# Altium PCB Test.PcbDoc (part 3 of 4)
Units mm, origin at the board's own origin, x right, y up, seen from the top; angles counter-clockwise.
Board outline 152.4 x 101.6 mm, 4 copper layers (Top Layer 1, Top Layer, Bottom Layer, Bottom Layer 1), stack 0.603 mm thick; 308 components, 154 nets, 859 pads, 6474 vias.
Unrouted connection lines stored in the file: 683.
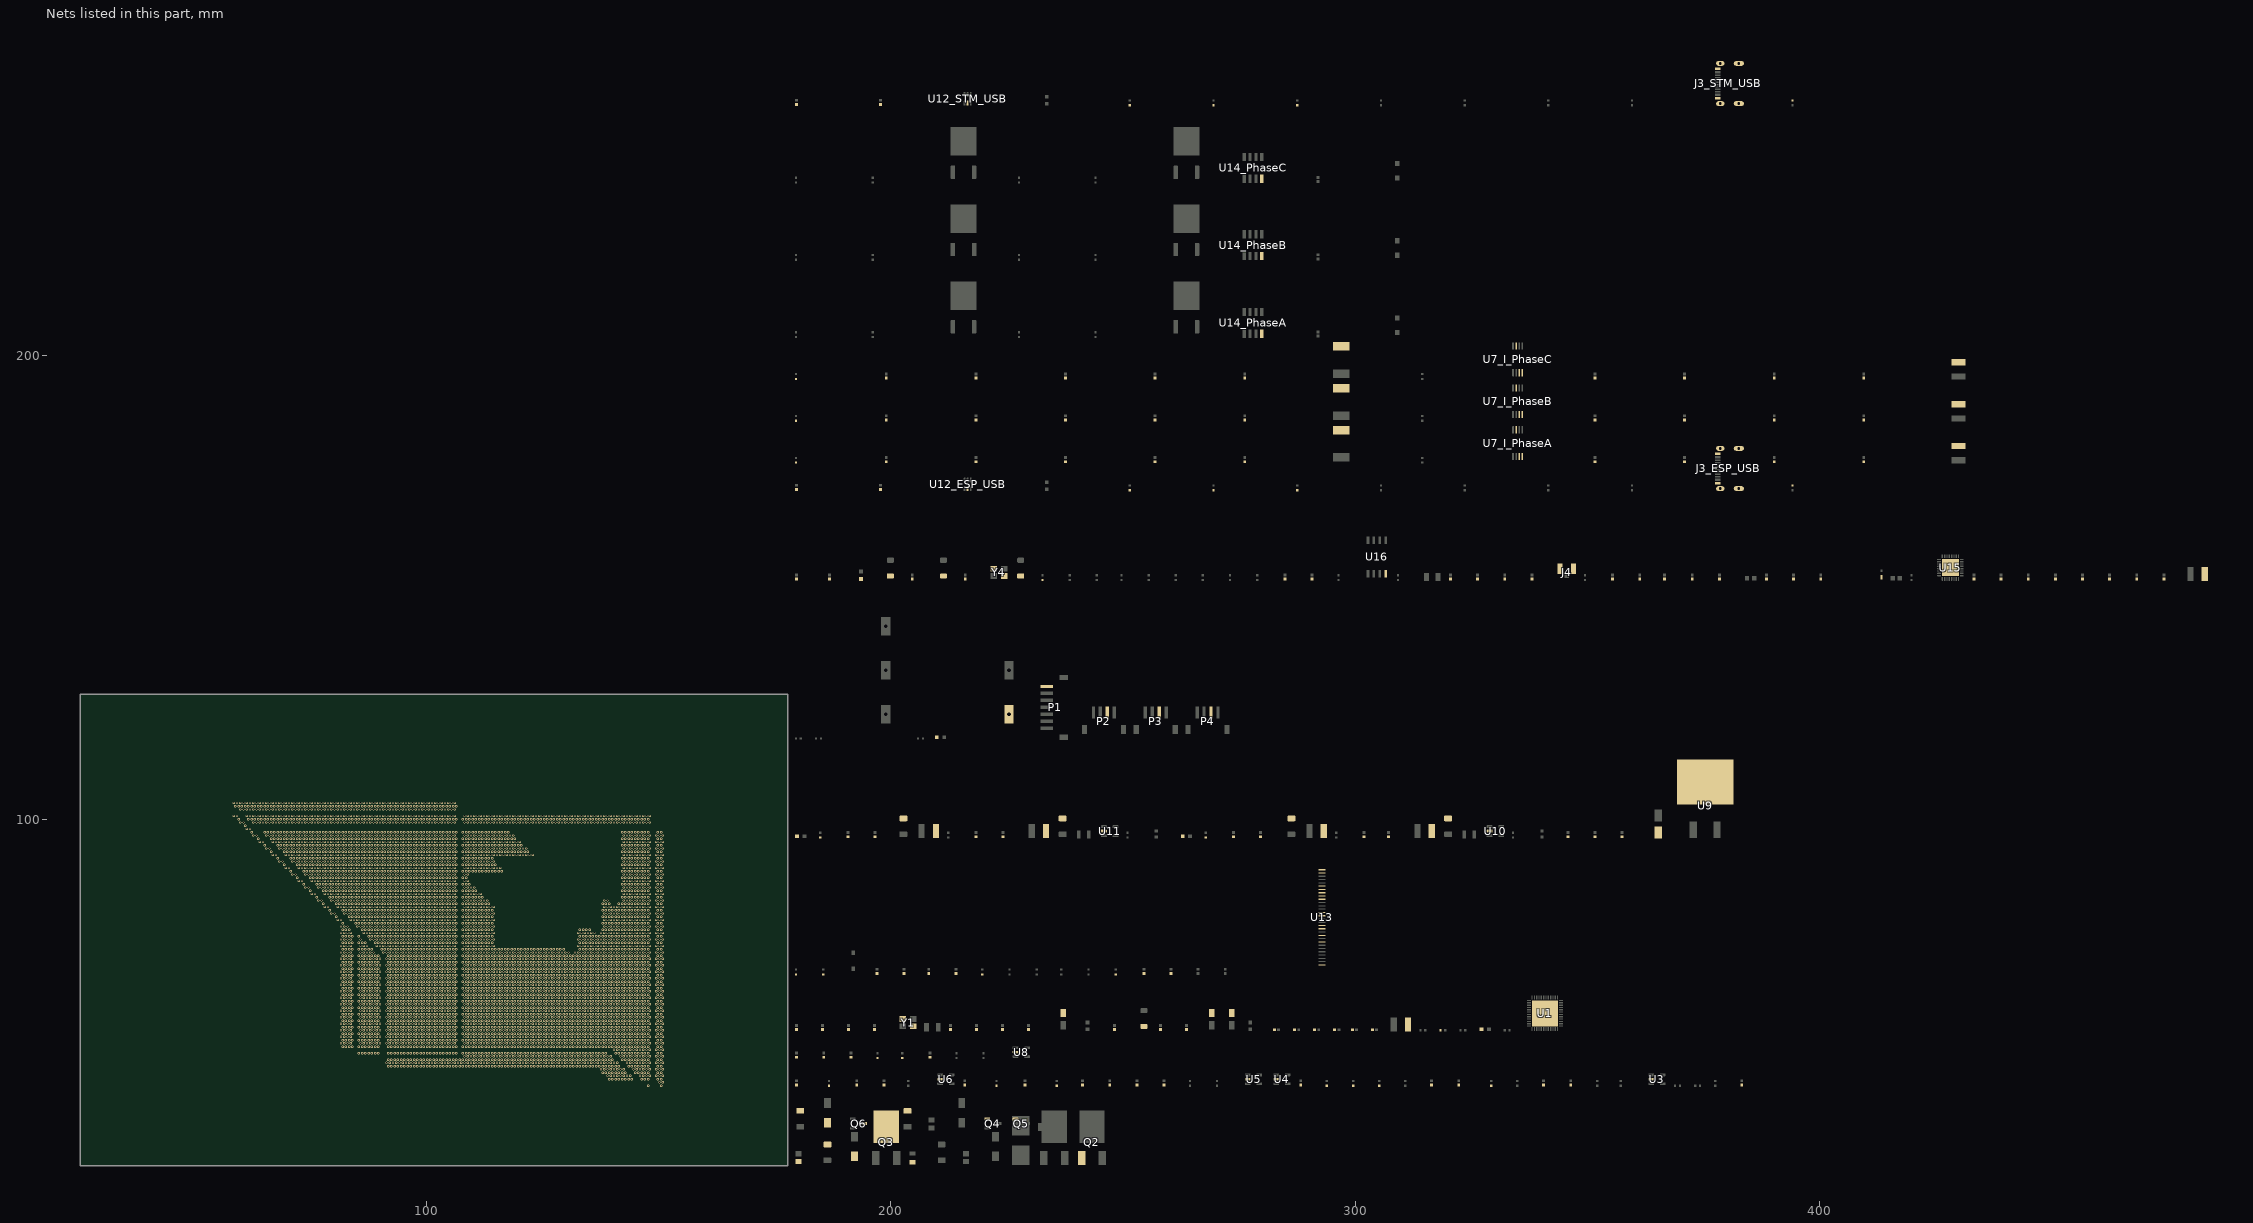
[diagram p5: the nets of this part, all layers, seen from the top]

## Via types
v1: diameter 0.5, hole 0.3, Top Layer 1 to Bottom Layer 1, tented both sides, 6470 vias
v2: diameter 1.27, hole 0.711, Top Layer 1 to Bottom Layer 1, 4 vias

## Nets (pads, with @x,y where several pads share a name; then routed paths per layer and width w, separated by ;. In a path a pad name is that pad's centre, name@x,y a point inside that pad or via, vN(x,y) a via of type N, cw(c..) or ccw(c..) an arc to the next point about the centre after c; other vN are vias at no path point) (continued)
GND: (continued)
  other v1: 147.7,42.7 150.5,42.7 150.15,43.4 150.85,43.4 139.3,44.1 140,44.1 140.7,44.1 141.4,44.1 142.1,44.1 142.8,44.1 143.5,44.1 144.2,44.1 146.3,44.1 147,44.1 147.7,44.1 149.8,44.1 150.5,44.1 138.95,44.8 139.65,44.8 140.35,44.8 141.05,44.8 141.75,44.8 142.45,44.8 143.15,44.8 143.85,44.8 145.95,44.8 146.65,44.8 147.35,44.8 148.05,44.8 149.45,44.8 150.15,44.8 150.85,44.8 137.9,45.5 138.6,45.5 139.3,45.5 140,45.5 140.7,45.5 141.4,45.5 142.1,45.5 142.8,45.5 144.9,45.5 145.6,45.5 146.3,45.5 147,45.5 147.7,45.5 149.8,45.5 150.5,45.5 137.55,46.2 138.25,46.2 138.95,46.2 139.65,46.2 140.35,46.2 141.05,46.2 141.75,46.2 142.45,46.2 144.55,46.2 145.25,46.2 145.95,46.2 146.65,46.2 147.35,46.2 148.05,46.2 149.45,46.2 150.15,46.2 150.85,46.2 91.7,46.9 92.4,46.9 93.1,46.9 93.8,46.9 94.5,46.9 95.2,46.9 95.9,46.9 96.6,46.9 97.3,46.9 98,46.9 98.7,46.9 99.4,46.9 100.1,46.9 100.8,46.9 101.5,46.9 102.2,46.9 102.9,46.9 103.6,46.9 104.3,46.9 105,46.9 105.7,46.9 106.4,46.9 107.1,46.9 107.8,46.9 108.5,46.9 109.2,46.9 109.9,46.9 110.6,46.9 111.3,46.9 112,46.9 112.7,46.9 113.4,46.9 114.1,46.9 114.8,46.9 115.5,46.9 116.2,46.9 116.9,46.9 117.6,46.9 118.3,46.9 119,46.9 119.7,46.9 120.4,46.9 121.1,46.9 121.8,46.9 122.5,46.9 123.2,46.9 123.9,46.9 124.6,46.9 125.3,46.9 126,46.9 126.7,46.9 127.4,46.9 128.1,46.9 128.8,46.9 129.5,46.9 130.2,46.9 130.9,46.9 131.6,46.9 132.3,46.9 133,46.9 133.7,46.9 134.4,46.9 135.1,46.9 135.8,46.9 136.5,46.9 137.2,46.9 137.9,46.9 138.6,46.9 139.3,46.9 140,46.9 140.7,46.9 141.4,46.9 143.5,46.9 144.2,46.9 144.9,46.9 145.6,46.9 146.3,46.9 147,46.9 147.7,46.9 149.8,46.9 150.5,46.9 91.35,47.6 92.05,47.6 92.75,47.6 93.45,47.6 94.15,47.6 94.85,47.6 95.55,47.6 96.25,47.6 96.95,47.6 97.65,47.6 98.35,47.6 99.05,47.6 99.75,47.6 100.45,47.6 101.15,47.6 101.85,47.6 102.55,47.6 103.25,47.6 103.95,47.6 104.65,47.6 105.35,47.6 106.05,47.6 106.75,47.6 107.45,47.6 108.15,47.6 108.85,47.6 109.55,47.6 110.25,47.6 110.95,47.6 111.65,47.6 112.35,47.6 113.05,47.6 113.75,47.6 114.45,47.6 115.15,47.6 115.85,47.6 116.55,47.6 117.25,47.6 117.95,47.6 118.65,47.6 119.35,47.6 120.05,47.6 120.75,47.6 121.45,47.6 122.15,47.6 122.85,47.6 123.55,47.6 124.25,47.6 124.95,47.6 125.65,47.6 126.35,47.6 127.05,47.6 127.75,47.6 128.45,47.6 129.15,47.6 129.85,47.6 130.55,47.6 131.25,47.6 131.95,47.6 132.65,47.6 133.35,47.6 134.05,47.6 134.75,47.6 135.45,47.6 136.15,47.6 136.85,47.6 137.55,47.6 138.25,47.6 138.95,47.6 139.65,47.6 140.35,47.6 141.05,47.6 143.15,47.6 143.85,47.6 144.55,47.6 145.25,47.6 145.95,47.6 146.65,47.6 147.35,47.6 148.05,47.6 149.45,47.6 150.15,47.6 150.85,47.6 91.7,48.3 92.4,48.3 93.1,48.3 93.8,48.3 94.5,48.3 95.2,48.3 95.9,48.3 96.6,48.3 97.3,48.3 98,48.3 98.7,48.3 99.4,48.3 100.1,48.3 100.8,48.3 101.5,48.3 102.2,48.3 102.9,48.3 103.6,48.3 104.3,48.3 105,48.3 105.7,48.3 106.4,48.3 107.1,48.3 107.8,48.3 108.5,48.3 109.2,48.3 109.9,48.3 110.6,48.3 111.3,48.3 112,48.3 112.7,48.3 113.4,48.3 114.1,48.3 114.8,48.3 115.5,48.3 116.2,48.3 116.9,48.3 117.6,48.3 118.3,48.3 119,48.3 119.7,48.3 120.4,48.3 121.1,48.3 121.8,48.3 122.5,48.3 123.2,48.3 123.9,48.3 124.6,48.3 125.3,48.3 126,48.3 126.7,48.3 127.4,48.3 128.1,48.3 128.8,48.3 129.5,48.3 130.2,48.3 130.9,48.3 131.6,48.3 132.3,48.3 133,48.3 133.7,48.3 134.4,48.3 135.1,48.3 135.8,48.3 136.5,48.3 137.2,48.3 137.9,48.3 138.6,48.3 139.3,48.3 140,48.3 142.1,48.3 142.8,48.3 143.5,48.3 144.2,48.3 144.9,48.3 145.6,48.3 146.3,48.3 147,48.3 147.7,48.3 149.8,48.3 150.5,48.3 108.15,49 108.85,49 109.55,49 110.25,49 110.95,49 111.65,49 112.35,49 113.05,49 113.75,49 114.45,49 115.15,49 115.85,49 116.55,49 117.25,49 117.95,49 118.65,49 119.35,49 120.05,49 120.75,49 121.45,49 122.15,49 122.85,49 123.55,49 124.25,49 124.95,49 125.65,49 126.35,49 127.05,49 127.75,49 128.45,49 129.15,49 129.85,49 130.55,49 131.25,49 131.95,49 132.65,49 133.35,49 134.05,49 134.75,49 135.45,49 136.15,49 136.85,49 137.55,49 138.25,49 138.95,49 139.65,49 141.75,49 142.45,49 143.15,49 143.85,49 144.55,49 145.25,49 145.95,49 146.65,49 147.35,49 148.05,49 149.45,49 150.15,49 150.85,49 85.4,49.7 86.1,49.7 86.8,49.7 87.5,49.7 88.2,49.7 88.9,49.7 89.6,49.7 91.7,49.7 92.4,49.7 93.1,49.7 93.8,49.7 94.5,49.7 95.2,49.7 95.9,49.7 96.6,49.7 97.3,49.7 98,49.7 98.7,49.7 99.4,49.7 100.1,49.7 100.8,49.7 101.5,49.7 102.2,49.7 102.9,49.7 103.6,49.7 104.3,49.7 105,49.7 105.7,49.7 106.4,49.7 107.8,49.7 108.5,49.7 109.2,49.7 109.9,49.7 110.6,49.7 111.3,49.7 112,49.7 112.7,49.7 113.4,49.7 114.1,49.7 114.8,49.7 115.5,49.7 116.2,49.7 116.9,49.7 117.6,49.7 118.3,49.7 119,49.7 119.7,49.7 120.4,49.7 121.1,49.7 121.8,49.7 122.5,49.7 123.2,49.7 123.9,49.7 124.6,49.7 125.3,49.7 126,49.7 126.7,49.7 127.4,49.7 128.1,49.7 128.8,49.7 129.5,49.7 130.2,49.7 130.9,49.7 131.6,49.7 132.3,49.7 133,49.7 133.7,49.7 134.4,49.7 135.1,49.7 135.8,49.7 136.5,49.7 137.2,49.7 137.9,49.7 138.6,49.7 140.7,49.7 141.4,49.7 142.1,49.7 142.8,49.7 143.5,49.7 144.2,49.7 144.9,49.7 145.6,49.7 146.3,49.7 147,49.7 147.7,49.7 149.8,49.7 150.5,49.7 140.35,50.4 141.05,50.4 141.75,50.4 142.45,50.4 143.15,50.4 143.85,50.4 144.55,50.4 145.25,50.4 145.95,50.4 146.65,50.4 147.35,50.4 148.05,50.4 149.45,50.4 150.15,50.4 150.85,50.4 81.9,51.1 82.6,51.1 83.3,51.1 84,51.1 85.4,51.1 86.1,51.1 86.8,51.1 87.5,51.1 88.2,51.1 88.9,51.1 89.6,51.1 91.7,51.1 92.4,51.1 93.1,51.1 93.8,51.1 94.5,51.1 95.2,51.1 95.9,51.1 96.6,51.1 97.3,51.1 98,51.1 98.7,51.1 99.4,51.1 100.1,51.1 100.8,51.1 101.5,51.1 102.2,51.1 102.9,51.1 103.6,51.1 104.3,51.1 105,51.1 105.7,51.1 106.4,51.1 107.8,51.1 108.5,51.1 109.2,51.1 109.9,51.1 110.6,51.1 111.3,51.1 112,51.1 112.7,51.1 113.4,51.1 114.1,51.1 114.8,51.1 115.5,51.1 116.2,51.1 116.9,51.1 117.6,51.1 118.3,51.1 119,51.1 119.7,51.1 120.4,51.1 121.1,51.1 121.8,51.1 122.5,51.1 123.2,51.1 123.9,51.1 124.6,51.1 125.3,51.1 126,51.1 126.7,51.1 127.4,51.1 128.1,51.1 128.8,51.1 129.5,51.1 130.2,51.1 130.9,51.1 131.6,51.1 132.3,51.1 133,51.1 133.7,51.1 134.4,51.1 135.1,51.1 135.8,51.1 136.5,51.1 137.2,51.1 137.9,51.1 138.6,51.1 139.3,51.1 140,51.1 140.7,51.1 141.4,51.1 142.1,51.1 142.8,51.1 143.5,51.1 144.2,51.1 144.9,51.1 145.6,51.1 146.3,51.1 147,51.1 147.7,51.1 149.8,51.1 150.5,51.1 81.55,51.8 82.25,51.8 82.95,51.8 83.65,51.8 85.75,51.8 86.45,51.8 87.15,51.8 87.85,51.8 88.55,51.8 89.25,51.8 89.95,51.8 91.35,51.8 92.05,51.8 92.75,51.8 93.45,51.8 94.15,51.8 94.85,51.8 95.55,51.8 96.25,51.8 96.95,51.8 97.65,51.8 98.35,51.8 99.05,51.8 99.75,51.8 100.45,51.8 101.15,51.8 101.85,51.8 102.55,51.8 103.25,51.8 103.95,51.8 104.65,51.8 105.35,51.8 106.05,51.8 108.15,51.8 108.85,51.8 109.55,51.8 110.25,51.8 110.95,51.8 111.65,51.8 112.35,51.8 113.05,51.8 113.75,51.8 114.45,51.8 115.15,51.8 115.85,51.8 116.55,51.8 117.25,51.8 117.95,51.8 118.65,51.8 119.35,51.8 120.05,51.8 120.75,51.8 121.45,51.8 122.15,51.8 122.85,51.8 123.55,51.8 124.25,51.8 124.95,51.8 125.65,51.8 126.35,51.8 127.05,51.8 127.75,51.8 128.45,51.8 129.15,51.8 129.85,51.8 130.55,51.8 131.25,51.8 131.95,51.8 132.65,51.8 133.35,51.8 134.05,51.8 134.75,51.8 135.45,51.8 136.15,51.8 136.85,51.8 137.55,51.8 138.25,51.8 138.95,51.8 139.65,51.8 140.35,51.8 141.05,51.8 141.75,51.8 142.45,51.8 143.15,51.8 143.85,51.8 144.55,51.8 145.25,51.8 145.95,51.8 146.65,51.8 147.35,51.8 148.05,51.8 149.45,51.8 150.15,51.8 150.85,51.8 81.9,52.5 82.6,52.5 83.3,52.5 84,52.5 85.4,52.5 86.1,52.5 86.8,52.5 87.5,52.5 88.2,52.5 88.9,52.5 89.6,52.5 91.7,52.5 92.4,52.5 93.1,52.5 93.8,52.5 94.5,52.5 95.2,52.5 95.9,52.5 96.6,52.5 97.3,52.5 98,52.5 98.7,52.5 99.4,52.5 100.1,52.5 100.8,52.5 101.5,52.5 102.2,52.5 102.9,52.5 103.6,52.5 104.3,52.5 105,52.5 105.7,52.5 106.4,52.5 107.8,52.5 108.5,52.5 109.2,52.5 109.9,52.5 110.6,52.5 111.3,52.5 112,52.5 112.7,52.5 113.4,52.5 114.1,52.5 114.8,52.5 115.5,52.5 116.2,52.5 116.9,52.5 117.6,52.5 118.3,52.5 119,52.5 119.7,52.5 120.4,52.5 121.1,52.5 121.8,52.5 122.5,52.5 123.2,52.5 123.9,52.5 124.6,52.5 125.3,52.5 126,52.5 126.7,52.5 127.4,52.5 128.1,52.5 128.8,52.5 129.5,52.5 130.2,52.5 130.9,52.5 131.6,52.5 132.3,52.5 133,52.5 133.7,52.5 134.4,52.5 135.1,52.5 135.8,52.5 136.5,52.5 137.2,52.5 137.9,52.5 138.6,52.5 139.3,52.5 140,52.5 140.7,52.5 141.4,52.5 142.1,52.5 142.8,52.5 143.5,52.5 144.2,52.5 144.9,52.5 145.6,52.5 146.3,52.5 147,52.5 147.7,52.5 149.8,52.5 150.5,52.5 81.55,53.2 82.25,53.2 82.95,53.2 83.65,53.2 85.75,53.2 86.45,53.2 87.15,53.2 87.85,53.2 88.55,53.2 89.25,53.2 89.95,53.2 91.35,53.2 92.05,53.2 92.75,53.2 93.45,53.2 94.15,53.2 94.85,53.2 95.55,53.2 96.25,53.2 96.95,53.2 97.65,53.2 98.35,53.2 99.05,53.2 99.75,53.2 100.45,53.2 101.15,53.2 101.85,53.2 102.55,53.2 103.25,53.2 103.95,53.2 104.65,53.2 105.35,53.2 106.05,53.2 108.15,53.2 108.85,53.2 109.55,53.2 110.25,53.2 110.95,53.2 111.65,53.2 112.35,53.2 113.05,53.2 113.75,53.2 114.45,53.2 115.15,53.2 115.85,53.2 116.55,53.2 117.25,53.2 117.95,53.2 118.65,53.2 119.35,53.2 120.05,53.2 120.75,53.2 121.45,53.2 122.15,53.2 122.85,53.2 123.55,53.2 124.25,53.2 124.95,53.2 125.65,53.2 126.35,53.2 127.05,53.2 127.75,53.2 128.45,53.2 129.15,53.2 129.85,53.2 130.55,53.2 131.25,53.2 131.95,53.2 132.65,53.2 133.35,53.2 134.05,53.2 134.75,53.2 135.45,53.2 136.15,53.2 136.85,53.2 137.55,53.2 138.25,53.2 138.95,53.2 139.65,53.2 140.35,53.2 141.05,53.2 141.75,53.2 142.45,53.2 143.15,53.2 143.85,53.2 144.55,53.2 145.25,53.2 145.95,53.2 146.65,53.2 147.35,53.2 148.05,53.2 149.45,53.2 150.15,53.2 150.85,53.2 81.9,53.9 82.6,53.9 83.3,53.9 84,53.9 85.4,53.9 86.1,53.9 86.8,53.9 87.5,53.9 88.2,53.9 88.9,53.9 89.6,53.9 91.7,53.9 92.4,53.9 93.1,53.9 93.8,53.9 94.5,53.9 95.2,53.9 95.9,53.9 96.6,53.9 97.3,53.9 98,53.9 98.7,53.9 99.4,53.9 100.1,53.9 100.8,53.9 101.5,53.9 102.2,53.9 102.9,53.9 103.6,53.9 104.3,53.9 105,53.9 105.7,53.9 106.4,53.9 107.8,53.9 108.5,53.9 109.2,53.9 109.9,53.9 110.6,53.9 111.3,53.9 112,53.9 112.7,53.9 113.4,53.9 114.1,53.9 114.8,53.9 115.5,53.9 116.2,53.9 116.9,53.9 117.6,53.9 118.3,53.9 119,53.9 119.7,53.9 120.4,53.9 121.1,53.9 121.8,53.9 122.5,53.9 123.2,53.9 123.9,53.9 124.6,53.9 125.3,53.9 126,53.9 126.7,53.9 127.4,53.9 128.1,53.9 128.8,53.9 129.5,53.9 130.2,53.9 130.9,53.9 131.6,53.9 132.3,53.9 133,53.9 133.7,53.9 134.4,53.9 135.1,53.9 135.8,53.9 136.5,53.9 137.2,53.9 137.9,53.9 138.6,53.9 139.3,53.9 140,53.9 140.7,53.9 141.4,53.9 142.1,53.9 142.8,53.9 143.5,53.9 144.2,53.9 144.9,53.9 145.6,53.9 146.3,53.9 147,53.9 147.7,53.9 149.8,53.9 150.5,53.9 81.55,54.6 82.25,54.6 82.95,54.6 83.65,54.6 85.75,54.6 86.45,54.6 87.15,54.6 87.85,54.6 88.55,54.6 89.25,54.6 89.95,54.6 91.35,54.6 92.05,54.6 92.75,54.6 93.45,54.6 94.15,54.6 94.85,54.6 95.55,54.6 96.25,54.6 96.95,54.6 97.65,54.6 98.35,54.6 99.05,54.6 99.75,54.6 100.45,54.6 101.15,54.6 101.85,54.6 102.55,54.6 103.25,54.6 103.95,54.6 104.65,54.6 105.35,54.6 106.05,54.6 108.15,54.6 108.85,54.6 109.55,54.6 110.25,54.6 110.95,54.6 111.65,54.6 112.35,54.6 113.05,54.6 113.75,54.6 114.45,54.6 115.15,54.6 115.85,54.6 116.55,54.6 117.25,54.6 117.95,54.6 118.65,54.6 119.35,54.6 120.05,54.6 120.75,54.6 121.45,54.6 122.15,54.6 122.85,54.6 123.55,54.6 124.25,54.6 124.95,54.6 125.65,54.6 126.35,54.6 127.05,54.6 127.75,54.6 128.45,54.6 129.15,54.6 129.85,54.6 130.55,54.6 131.25,54.6 131.95,54.6 132.65,54.6 133.35,54.6 134.05,54.6 134.75,54.6 135.45,54.6 136.15,54.6 136.85,54.6 137.55,54.6 138.25,54.6 138.95,54.6 139.65,54.6 140.35,54.6 141.05,54.6 141.75,54.6 142.45,54.6 143.15,54.6 143.85,54.6 144.55,54.6 145.25,54.6 145.95,54.6 146.65,54.6 147.35,54.6 148.05,54.6 149.45,54.6 150.15,54.6 150.85,54.6 81.9,55.3 82.6,55.3 83.3,55.3 84,55.3 85.4,55.3 86.1,55.3 86.8,55.3 87.5,55.3 88.2,55.3 88.9,55.3 89.6,55.3 91.7,55.3 92.4,55.3 93.1,55.3 93.8,55.3 94.5,55.3 95.2,55.3 95.9,55.3 96.6,55.3 97.3,55.3 98,55.3 98.7,55.3 99.4,55.3 100.1,55.3 100.8,55.3 101.5,55.3 102.2,55.3 102.9,55.3 103.6,55.3 104.3,55.3 105,55.3 105.7,55.3 106.4,55.3 107.8,55.3 108.5,55.3 109.2,55.3 109.9,55.3 110.6,55.3 111.3,55.3 112,55.3 112.7,55.3 113.4,55.3 114.1,55.3 114.8,55.3 115.5,55.3 116.2,55.3 116.9,55.3 117.6,55.3 118.3,55.3 119,55.3 119.7,55.3 120.4,55.3 121.1,55.3 121.8,55.3 122.5,55.3 123.2,55.3 123.9,55.3 124.6,55.3 125.3,55.3 126,55.3 126.7,55.3 127.4,55.3 128.1,55.3 128.8,55.3 129.5,55.3 130.2,55.3 130.9,55.3 131.6,55.3 132.3,55.3 133,55.3 133.7,55.3 134.4,55.3 135.1,55.3 135.8,55.3 136.5,55.3 137.2,55.3 137.9,55.3 138.6,55.3 139.3,55.3 140,55.3 140.7,55.3 141.4,55.3 142.1,55.3 142.8,55.3 143.5,55.3 144.2,55.3 144.9,55.3 145.6,55.3 146.3,55.3 147,55.3 147.7,55.3 149.8,55.3 150.5,55.3 81.55,56 82.25,56 82.95,56 83.65,56 85.75,56 86.45,56 87.15,56 87.85,56 88.55,56 89.25,56 89.95,56 91.35,56 92.05,56 92.75,56 93.45,56 94.15,56 94.85,56 95.55,56 96.25,56 96.95,56 97.65,56 98.35,56 99.05,56 99.75,56 100.45,56 101.15,56 101.85,56 102.55,56 103.25,56 103.95,56 104.65,56 105.35,56 106.05,56 108.15,56 108.85,56 109.55,56 110.25,56 110.95,56 111.65,56 112.35,56 113.05,56 113.75,56 114.45,56 115.15,56 115.85,56 116.55,56 117.25,56 117.95,56 118.65,56 119.35,56 120.05,56 120.75,56 121.45,56 122.15,56 122.85,56 123.55,56 124.25,56 124.95,56 125.65,56 126.35,56 127.05,56 127.75,56 128.45,56 129.15,56 129.85,56 130.55,56 131.25,56 131.95,56 132.65,56 133.35,56 134.05,56 134.75,56 135.45,56 136.15,56 136.85,56 137.55,56 138.25,56 138.95,56 139.65,56 140.35,56 141.05,56 141.75,56 142.45,56 143.15,56 143.85,56 144.55,56 145.25,56 145.95,56 146.65,56 147.35,56 148.05,56 149.45,56 150.15,56 150.85,56 81.9,56.7 82.6,56.7 83.3,56.7 84,56.7 85.4,56.7 86.1,56.7 86.8,56.7 87.5,56.7 88.2,56.7 88.9,56.7 89.6,56.7 91.7,56.7 92.4,56.7 93.1,56.7 93.8,56.7 94.5,56.7 95.2,56.7 95.9,56.7 96.6,56.7 97.3,56.7 98,56.7 98.7,56.7 99.4,56.7 100.1,56.7 100.8,56.7 101.5,56.7 102.2,56.7 102.9,56.7 103.6,56.7 104.3,56.7 105,56.7 105.7,56.7 106.4,56.7 107.8,56.7 108.5,56.7 109.2,56.7 109.9,56.7 110.6,56.7 111.3,56.7 112,56.7 112.7,56.7 113.4,56.7 114.1,56.7 114.8,56.7 115.5,56.7 116.2,56.7 116.9,56.7 117.6,56.7 118.3,56.7 119,56.7 119.7,56.7 120.4,56.7 121.1,56.7 121.8,56.7 122.5,56.7 123.2,56.7 123.9,56.7 124.6,56.7 125.3,56.7 126,56.7 126.7,56.7 127.4,56.7 128.1,56.7 128.8,56.7 129.5,56.7 130.2,56.7 130.9,56.7 131.6,56.7 132.3,56.7 133,56.7 133.7,56.7 134.4,56.7 135.1,56.7 135.8,56.7 136.5,56.7 137.2,56.7 137.9,56.7 138.6,56.7 139.3,56.7 140,56.7 140.7,56.7 141.4,56.7 142.1,56.7 142.8,56.7 143.5,56.7 144.2,56.7 144.9,56.7 145.6,56.7 146.3,56.7 147,56.7 147.7,56.7 149.8,56.7 150.5,56.7 81.55,57.4 82.25,57.4 82.95,57.4 83.65,57.4 85.75,57.4 86.45,57.4 87.15,57.4 87.85,57.4 88.55,57.4 89.25,57.4 89.95,57.4 91.35,57.4 92.05,57.4 92.75,57.4 93.45,57.4 94.15,57.4 94.85,57.4 95.55,57.4 96.25,57.4 96.95,57.4 97.65,57.4 98.35,57.4 99.05,57.4 99.75,57.4 100.45,57.4 101.15,57.4 101.85,57.4 102.55,57.4 103.25,57.4 103.95,57.4 104.65,57.4 105.35,57.4 106.05,57.4 108.15,57.4 108.85,57.4 109.55,57.4 110.25,57.4 110.95,57.4 111.65,57.4 112.35,57.4 113.05,57.4 113.75,57.4 114.45,57.4 115.15,57.4 115.85,57.4 116.55,57.4 117.25,57.4 117.95,57.4 118.65,57.4 119.35,57.4 120.05,57.4 120.75,57.4 121.45,57.4 122.15,57.4 122.85,57.4 123.55,57.4 124.25,57.4 124.95,57.4 125.65,57.4 126.35,57.4 127.05,57.4 127.75,57.4 128.45,57.4 129.15,57.4 129.85,57.4 130.55,57.4 131.25,57.4 131.95,57.4 132.65,57.4 133.35,57.4 134.05,57.4 134.75,57.4 135.45,57.4 136.15,57.4 136.85,57.4 137.55,57.4 138.25,57.4 138.95,57.4 139.65,57.4 140.35,57.4 141.05,57.4 141.75,57.4 142.45,57.4 143.15,57.4 143.85,57.4 144.55,57.4 145.25,57.4 145.95,57.4 146.65,57.4 147.35,57.4 148.05,57.4 149.45,57.4 150.15,57.4 150.85,57.4 81.9,58.1 82.6,58.1 83.3,58.1 84,58.1 85.4,58.1 86.1,58.1 86.8,58.1 87.5,58.1 88.2,58.1 88.9,58.1 89.6,58.1 91.7,58.1 92.4,58.1 93.1,58.1 93.8,58.1 94.5,58.1 95.2,58.1 95.9,58.1 96.6,58.1 97.3,58.1 98,58.1 98.7,58.1 99.4,58.1 100.1,58.1 100.8,58.1 101.5,58.1 102.2,58.1 102.9,58.1 103.6,58.1 104.3,58.1 105,58.1 105.7,58.1 106.4,58.1 107.8,58.1 108.5,58.1 109.2,58.1 109.9,58.1 110.6,58.1 111.3,58.1 112,58.1 112.7,58.1 113.4,58.1 114.1,58.1 114.8,58.1 115.5,58.1 116.2,58.1 116.9,58.1 117.6,58.1 118.3,58.1 119,58.1 119.7,58.1 120.4,58.1 121.1,58.1 121.8,58.1 122.5,58.1 123.2,58.1 123.9,58.1 124.6,58.1 125.3,58.1 126,58.1 126.7,58.1 127.4,58.1 128.1,58.1 128.8,58.1 129.5,58.1 130.2,58.1 130.9,58.1 131.6,58.1 132.3,58.1 133,58.1 133.7,58.1 134.4,58.1 135.1,58.1 135.8,58.1 136.5,58.1 137.2,58.1 137.9,58.1 138.6,58.1 139.3,58.1 140,58.1 140.7,58.1 141.4,58.1 142.1,58.1 142.8,58.1 143.5,58.1 144.2,58.1 144.9,58.1 145.6,58.1 146.3,58.1 147,58.1 147.7,58.1 149.8,58.1 150.5,58.1 81.55,58.8 82.25,58.8 82.95,58.8 83.65,58.8 85.75,58.8 86.45,58.8 87.15,58.8 87.85,58.8 88.55,58.8 89.25,58.8 89.95,58.8 91.35,58.8 92.05,58.8 92.75,58.8 93.45,58.8 94.15,58.8 94.85,58.8 95.55,58.8 96.25,58.8 96.95,58.8 97.65,58.8 98.35,58.8 99.05,58.8 99.75,58.8 100.45,58.8 101.15,58.8 101.85,58.8 102.55,58.8 103.25,58.8 103.95,58.8 104.65,58.8 105.35,58.8 106.05,58.8 108.15,58.8 108.85,58.8 109.55,58.8 110.25,58.8 110.95,58.8 111.65,58.8 112.35,58.8 113.05,58.8 113.75,58.8 114.45,58.8 115.15,58.8 115.85,58.8 116.55,58.8 117.25,58.8 117.95,58.8 118.65,58.8 119.35,58.8 120.05,58.8 120.75,58.8 121.45,58.8 122.15,58.8 122.85,58.8 123.55,58.8 124.25,58.8 124.95,58.8 125.65,58.8 126.35,58.8 127.05,58.8 127.75,58.8 128.45,58.8 129.15,58.8 129.85,58.8 130.55,58.8 131.25,58.8 131.95,58.8 132.65,58.8 133.35,58.8 134.05,58.8 134.75,58.8 135.45,58.8 136.15,58.8 136.85,58.8 137.55,58.8 138.25,58.8 138.95,58.8 139.65,58.8 140.35,58.8 141.05,58.8 141.75,58.8 142.45,58.8 143.15,58.8 143.85,58.8 144.55,58.8 145.25,58.8 145.95,58.8 146.65,58.8 147.35,58.8 148.05,58.8 149.45,58.8 150.15,58.8 150.85,58.8 81.9,59.5 82.6,59.5 83.3,59.5 84,59.5 85.4,59.5 86.1,59.5 86.8,59.5 87.5,59.5 88.2,59.5 88.9,59.5 89.6,59.5 91.7,59.5 92.4,59.5 93.1,59.5 93.8,59.5 94.5,59.5 95.2,59.5 95.9,59.5 96.6,59.5 97.3,59.5 98,59.5 98.7,59.5 99.4,59.5 100.1,59.5 100.8,59.5 101.5,59.5 102.2,59.5 102.9,59.5 103.6,59.5 104.3,59.5 105,59.5 105.7,59.5 106.4,59.5 107.8,59.5 108.5,59.5 109.2,59.5 109.9,59.5 110.6,59.5 111.3,59.5 112,59.5 112.7,59.5 113.4,59.5 114.1,59.5 114.8,59.5 115.5,59.5 116.2,59.5 116.9,59.5 117.6,59.5 118.3,59.5 119,59.5 119.7,59.5 120.4,59.5 121.1,59.5 121.8,59.5 122.5,59.5 123.2,59.5 123.9,59.5 124.6,59.5 125.3,59.5 126,59.5 126.7,59.5 127.4,59.5 128.1,59.5 128.8,59.5 129.5,59.5 130.2,59.5 130.9,59.5 131.6,59.5 132.3,59.5 133,59.5 133.7,59.5 134.4,59.5 135.1,59.5 135.8,59.5 136.5,59.5 137.2,59.5 137.9,59.5 138.6,59.5 139.3,59.5 140,59.5 140.7,59.5 141.4,59.5 142.1,59.5 142.8,59.5 143.5,59.5 144.2,59.5 144.9,59.5 145.6,59.5 146.3,59.5 147,59.5 147.7,59.5 149.8,59.5 150.5,59.5 81.55,60.2 82.25,60.2 82.95,60.2 83.65,60.2 85.75,60.2 86.45,60.2 87.15,60.2 87.85,60.2 88.55,60.2 89.25,60.2 89.95,60.2 91.35,60.2 92.05,60.2 92.75,60.2 93.45,60.2 94.15,60.2 94.85,60.2 95.55,60.2 96.25,60.2 96.95,60.2 97.65,60.2 98.35,60.2 99.05,60.2 99.75,60.2 100.45,60.2 101.15,60.2 101.85,60.2 102.55,60.2 103.25,60.2 103.95,60.2 104.65,60.2 105.35,60.2 106.05,60.2 108.15,60.2 108.85,60.2 109.55,60.2 110.25,60.2 110.95,60.2 111.65,60.2 112.35,60.2 113.05,60.2 113.75,60.2 114.45,60.2 115.15,60.2 115.85,60.2 116.55,60.2 117.25,60.2 117.95,60.2 118.65,60.2 119.35,60.2 120.05,60.2 120.75,60.2 121.45,60.2 122.15,60.2 122.85,60.2 123.55,60.2 124.25,60.2 124.95,60.2 125.65,60.2 126.35,60.2 127.05,60.2 127.75,60.2 128.45,60.2 129.15,60.2 129.85,60.2 130.55,60.2 131.25,60.2 131.95,60.2 132.65,60.2 133.35,60.2 134.05,60.2 134.75,60.2 135.45,60.2 136.15,60.2 136.85,60.2 137.55,60.2 138.25,60.2 138.95,60.2 139.65,60.2 140.35,60.2 141.05,60.2 141.75,60.2 142.45,60.2 143.15,60.2 143.85,60.2 144.55,60.2 145.25,60.2 145.95,60.2 146.65,60.2 147.35,60.2 148.05,60.2 149.45,60.2 150.15,60.2 150.85,60.2 81.9,60.9 82.6,60.9 83.3,60.9 84,60.9 85.4,60.9 86.1,60.9 86.8,60.9 87.5,60.9 88.2,60.9 88.9,60.9 89.6,60.9 91.7,60.9 92.4,60.9 93.1,60.9 93.8,60.9 94.5,60.9 95.2,60.9 95.9,60.9 96.6,60.9 97.3,60.9 98,60.9 98.7,60.9 99.4,60.9 100.1,60.9 100.8,60.9 101.5,60.9 102.2,60.9 102.9,60.9 103.6,60.9 104.3,60.9 105,60.9 105.7,60.9 106.4,60.9 107.8,60.9 108.5,60.9 109.2,60.9 109.9,60.9 110.6,60.9 111.3,60.9 112,60.9 112.7,60.9 113.4,60.9 114.1,60.9 114.8,60.9 115.5,60.9 116.2,60.9 116.9,60.9 117.6,60.9 118.3,60.9 119,60.9 119.7,60.9 120.4,60.9 121.1,60.9 121.8,60.9 122.5,60.9 123.2,60.9 123.9,60.9 124.6,60.9 125.3,60.9 126,60.9 126.7,60.9 127.4,60.9 128.1,60.9 128.8,60.9 129.5,60.9 130.2,60.9 130.9,60.9 131.6,60.9 132.3,60.9 133,60.9 133.7,60.9 134.4,60.9 135.1,60.9 135.8,60.9 136.5,60.9 137.2,60.9 137.9,60.9 138.6,60.9 139.3,60.9 140,60.9 140.7,60.9 141.4,60.9 142.1,60.9 142.8,60.9 143.5,60.9 144.2,60.9 144.9,60.9 145.6,60.9 146.3,60.9 147,60.9 147.7,60.9 149.8,60.9 150.5,60.9 81.55,61.6 82.25,61.6 82.95,61.6 83.65,61.6 85.75,61.6 86.45,61.6 87.15,61.6 87.85,61.6 88.55,61.6 89.25,61.6 89.95,61.6 91.35,61.6 92.05,61.6 92.75,61.6 93.45,61.6 94.15,61.6 94.85,61.6 95.55,61.6 96.25,61.6 96.95,61.6 97.65,61.6 98.35,61.6 99.05,61.6 99.75,61.6 100.45,61.6 101.15,61.6 101.85,61.6 102.55,61.6 103.25,61.6 103.95,61.6 104.65,61.6 105.35,61.6 106.05,61.6 108.15,61.6 108.85,61.6 109.55,61.6 110.25,61.6 110.95,61.6 111.65,61.6 112.35,61.6 113.05,61.6 113.75,61.6 114.45,61.6 115.15,61.6 115.85,61.6 116.55,61.6 117.25,61.6 117.95,61.6 118.65,61.6 119.35,61.6 120.05,61.6 120.75,61.6 121.45,61.6 122.15,61.6 122.85,61.6 123.55,61.6 124.25,61.6 124.95,61.6 125.65,61.6 126.35,61.6 127.05,61.6 127.75,61.6 128.45,61.6 129.15,61.6 129.85,61.6 130.55,61.6 131.25,61.6 131.95,61.6 132.65,61.6 133.35,61.6 134.05,61.6 134.75,61.6 135.45,61.6 136.15,61.6 136.85,61.6 137.55,61.6 138.25,61.6 138.95,61.6 139.65,61.6 140.35,61.6 141.05,61.6 141.75,61.6 142.45,61.6 143.15,61.6 143.85,61.6 144.55,61.6 145.25,61.6 145.95,61.6 146.65,61.6 147.35,61.6 148.05,61.6 149.45,61.6 150.15,61.6 150.85,61.6 81.9,62.3 82.6,62.3 83.3,62.3 84,62.3 85.4,62.3 86.1,62.3 86.8,62.3 87.5,62.3 88.2,62.3 88.9,62.3 89.6,62.3 91.7,62.3 92.4,62.3 93.1,62.3 93.8,62.3 94.5,62.3 95.2,62.3 95.9,62.3 96.6,62.3 97.3,62.3 98,62.3 98.7,62.3 99.4,62.3 100.1,62.3 100.8,62.3 101.5,62.3 102.2,62.3 102.9,62.3 103.6,62.3 104.3,62.3 105,62.3 105.7,62.3 106.4,62.3 107.8,62.3 108.5,62.3 109.2,62.3 109.9,62.3 110.6,62.3 111.3,62.3 112,62.3 112.7,62.3 113.4,62.3 114.1,62.3 114.8,62.3 115.5,62.3 116.2,62.3 116.9,62.3 117.6,62.3 118.3,62.3 119,62.3 119.7,62.3 120.4,62.3 121.1,62.3 121.8,62.3 122.5,62.3 123.2,62.3 123.9,62.3 124.6,62.3 125.3,62.3 126,62.3 126.7,62.3 127.4,62.3 128.1,62.3 128.8,62.3 129.5,62.3 130.2,62.3 130.9,62.3 131.6,62.3 132.3,62.3 133,62.3 133.7,62.3 134.4,62.3 135.1,62.3 135.8,62.3 136.5,62.3 137.2,62.3 137.9,62.3 138.6,62.3 139.3,62.3 140,62.3 140.7,62.3 141.4,62.3 142.1,62.3 142.8,62.3 143.5,62.3 144.2,62.3 144.9,62.3 145.6,62.3 146.3,62.3 147,62.3 147.7,62.3 149.8,62.3 150.5,62.3 81.55,63 82.25,63 82.95,63 83.65,63 85.75,63 86.45,63 87.15,63 87.85,63 88.55,63 89.25,63 89.95,63 91.35,63 92.05,63 92.75,63 93.45,63 94.15,63 94.85,63 95.55,63 96.25,63 96.95,63 97.65,63 98.35,63 99.05,63 99.75,63 100.45,63 101.15,63 101.85,63 102.55,63 103.25,63 103.95,63 104.65,63 105.35,63 106.05,63 108.15,63 108.85,63 109.55,63 110.25,63 110.95,63 111.65,63 112.35,63 113.05,63 113.75,63 114.45,63 115.15,63 115.85,63 116.55,63 117.25,63 117.95,63 118.65,63 119.35,63 120.05,63 120.75,63 121.45,63 122.15,63 122.85,63 123.55,63 124.25,63 124.95,63 125.65,63 126.35,63 127.05,63 127.75,63 128.45,63 129.15,63 129.85,63 130.55,63 131.25,63 131.95,63 132.65,63 133.35,63 134.05,63 134.75,63 135.45,63 136.15,63 136.85,63 137.55,63 138.25,63 138.95,63 139.65,63 140.35,63 141.05,63 141.75,63 142.45,63 143.15,63 143.85,63 144.55,63 145.25,63 145.95,63 146.65,63 147.35,63 148.05,63 149.45,63 150.15,63 150.85,63 81.9,63.7 82.6,63.7 83.3,63.7 84,63.7 85.4,63.7 86.1,63.7 86.8,63.7 87.5,63.7 88.2,63.7 88.9,63.7 89.6,63.7 91.7,63.7 92.4,63.7 93.1,63.7 93.8,63.7 94.5,63.7 95.2,63.7 95.9,63.7 96.6,63.7 97.3,63.7 98,63.7 98.7,63.7 99.4,63.7 100.1,63.7 100.8,63.7 101.5,63.7 102.2,63.7 102.9,63.7 103.6,63.7 104.3,63.7 105,63.7 105.7,63.7 106.4,63.7 107.8,63.7 108.5,63.7 109.2,63.7 109.9,63.7 110.6,63.7 111.3,63.7 112,63.7 112.7,63.7 113.4,63.7 114.1,63.7 114.8,63.7 115.5,63.7 116.2,63.7 116.9,63.7 117.6,63.7 118.3,63.7 119,63.7 119.7,63.7 120.4,63.7 121.1,63.7 121.8,63.7 122.5,63.7 123.2,63.7 123.9,63.7 124.6,63.7 125.3,63.7 126,63.7 126.7,63.7 127.4,63.7 128.1,63.7 128.8,63.7 129.5,63.7 130.2,63.7 130.9,63.7 131.6,63.7 132.3,63.7 133,63.7 133.7,63.7 134.4,63.7 135.1,63.7 135.8,63.7 136.5,63.7 137.2,63.7 137.9,63.7 138.6,63.7 139.3,63.7 140,63.7 140.7,63.7 141.4,63.7 142.1,63.7 142.8,63.7 143.5,63.7 144.2,63.7 144.9,63.7 145.6,63.7 146.3,63.7 147,63.7 147.7,63.7 149.8,63.7 150.5,63.7 81.55,64.4 82.25,64.4 82.95,64.4 83.65,64.4 85.75,64.4 86.45,64.4 87.15,64.4 87.85,64.4 88.55,64.4 89.25,64.4 89.95,64.4 91.35,64.4 92.05,64.4 92.75,64.4 93.45,64.4 94.15,64.4 94.85,64.4 95.55,64.4 96.25,64.4 96.95,64.4 97.65,64.4 98.35,64.4 99.05,64.4 99.75,64.4 100.45,64.4 101.15,64.4 101.85,64.4 102.55,64.4 103.25,64.4 103.95,64.4 104.65,64.4 105.35,64.4 106.05,64.4 108.15,64.4 108.85,64.4 109.55,64.4 110.25,64.4 110.95,64.4 111.65,64.4 112.35,64.4 113.05,64.4 113.75,64.4 114.45,64.4 115.15,64.4 115.85,64.4 116.55,64.4 117.25,64.4 117.95,64.4 118.65,64.4 119.35,64.4 120.05,64.4 120.75,64.4 121.45,64.4 122.15,64.4 122.85,64.4 123.55,64.4 124.25,64.4 124.95,64.4 125.65,64.4 126.35,64.4 127.05,64.4 127.75,64.4 128.45,64.4 129.15,64.4 129.85,64.4 130.55,64.4 131.25,64.4 131.95,64.4 132.65,64.4 133.35,64.4 134.05,64.4 134.75,64.4 135.45,64.4 136.15,64.4 136.85,64.4 137.55,64.4 138.25,64.4 138.95,64.4 139.65,64.4 140.35,64.4 141.05,64.4 141.75,64.4 142.45,64.4 143.15,64.4 143.85,64.4 144.55,64.4 145.25,64.4 145.95,64.4 146.65,64.4 147.35,64.4 148.05,64.4 149.45,64.4 150.15,64.4 150.85,64.4 81.9,65.1 82.6,65.1 83.3,65.1 84,65.1 85.4,65.1 86.1,65.1 86.8,65.1 87.5,65.1 88.2,65.1 88.9,65.1 89.6,65.1 91.7,65.1 92.4,65.1 93.1,65.1 93.8,65.1 94.5,65.1 95.2,65.1 95.9,65.1 96.6,65.1 97.3,65.1 98,65.1 98.7,65.1 99.4,65.1 100.1,65.1 100.8,65.1 101.5,65.1 102.2,65.1 102.9,65.1 103.6,65.1 104.3,65.1 105,65.1 105.7,65.1 106.4,65.1 107.8,65.1 108.5,65.1 109.2,65.1 109.9,65.1 110.6,65.1 111.3,65.1 112,65.1 112.7,65.1 113.4,65.1 114.1,65.1 114.8,65.1 115.5,65.1 116.2,65.1 116.9,65.1 117.6,65.1 118.3,65.1 119,65.1 119.7,65.1 120.4,65.1 121.1,65.1 121.8,65.1 122.5,65.1 123.2,65.1 123.9,65.1 124.6,65.1 125.3,65.1 126,65.1 126.7,65.1 127.4,65.1 128.1,65.1 128.8,65.1 129.5,65.1 130.2,65.1 130.9,65.1 131.6,65.1 132.3,65.1 133,65.1 133.7,65.1 134.4,65.1 135.1,65.1 135.8,65.1 136.5,65.1 137.2,65.1 137.9,65.1 138.6,65.1 139.3,65.1 140,65.1 140.7,65.1 141.4,65.1 142.1,65.1 142.8,65.1 143.5,65.1 144.2,65.1 144.9,65.1 145.6,65.1 146.3,65.1 147,65.1 147.7,65.1 149.8,65.1 150.5,65.1 81.55,65.8 82.25,65.8 82.95,65.8 83.65,65.8 85.75,65.8 86.45,65.8 87.15,65.8 87.85,65.8 88.55,65.8 89.25,65.8 89.95,65.8 91.35,65.8 92.05,65.8 92.75,65.8 93.45,65.8 94.15,65.8 94.85,65.8 95.55,65.8 96.25,65.8 96.95,65.8 97.65,65.8 98.35,65.8 99.05,65.8 99.75,65.8 100.45,65.8 101.15,65.8 101.85,65.8 102.55,65.8 103.25,65.8 103.95,65.8 104.65,65.8 105.35,65.8 106.05,65.8 108.15,65.8 108.85,65.8 109.55,65.8 110.25,65.8 110.95,65.8 111.65,65.8 112.35,65.8 113.05,65.8 113.75,65.8 114.45,65.8 115.15,65.8 115.85,65.8 116.55,65.8 117.25,65.8 117.95,65.8 118.65,65.8 119.35,65.8 120.05,65.8 120.75,65.8 121.45,65.8 122.15,65.8 122.85,65.8 123.55,65.8 124.25,65.8 124.95,65.8 125.65,65.8 126.35,65.8 127.05,65.8 127.75,65.8 128.45,65.8 129.15,65.8 129.85,65.8 130.55,65.8 131.25,65.8 131.95,65.8 132.65,65.8 133.35,65.8 134.05,65.8 134.75,65.8 135.45,65.8 136.15,65.8 136.85,65.8 137.55,65.8 138.25,65.8 138.95,65.8 139.65,65.8 140.35,65.8 141.05,65.8 141.75,65.8 142.45,65.8 143.15,65.8 143.85,65.8 144.55,65.8 145.25,65.8 145.95,65.8 146.65,65.8 147.35,65.8 148.05,65.8 149.45,65.8 150.15,65.8 150.85,65.8 81.9,66.5 82.6,66.5 83.3,66.5 84,66.5 85.4,66.5 86.1,66.5 86.8,66.5 87.5,66.5 88.2,66.5 88.9,66.5 89.6,66.5 91.7,66.5 92.4,66.5 93.1,66.5 93.8,66.5 94.5,66.5 95.2,66.5 95.9,66.5 96.6,66.5 97.3,66.5 98,66.5 98.7,66.5 99.4,66.5 100.1,66.5 100.8,66.5 101.5,66.5 102.2,66.5 102.9,66.5 103.6,66.5 104.3,66.5 105,66.5 105.7,66.5 106.4,66.5 107.8,66.5 108.5,66.5 109.2,66.5 109.9,66.5 110.6,66.5 111.3,66.5 112,66.5 112.7,66.5 113.4,66.5 114.1,66.5 114.8,66.5 115.5,66.5 116.2,66.5 116.9,66.5 117.6,66.5 118.3,66.5 119,66.5 119.7,66.5 120.4,66.5 121.1,66.5 121.8,66.5 122.5,66.5 123.2,66.5 123.9,66.5 124.6,66.5 125.3,66.5 126,66.5 126.7,66.5 127.4,66.5 128.1,66.5 128.8,66.5 129.5,66.5 130.2,66.5 130.9,66.5 131.6,66.5 132.3,66.5 133,66.5 133.7,66.5 134.4,66.5 135.1,66.5 135.8,66.5 136.5,66.5 137.2,66.5 137.9,66.5 138.6,66.5 139.3,66.5 140,66.5 140.7,66.5 141.4,66.5 142.1,66.5 142.8,66.5 143.5,66.5 144.2,66.5 144.9,66.5 145.6,66.5 146.3,66.5 147,66.5 147.7,66.5 149.8,66.5 150.5,66.5 81.55,67.2 82.25,67.2 82.95,67.2 83.65,67.2 85.75,67.2 86.45,67.2 87.15,67.2 87.85,67.2 88.55,67.2 89.25,67.2 89.95,67.2 91.35,67.2 92.05,67.2 92.75,67.2 93.45,67.2 94.15,67.2 94.85,67.2 95.55,67.2 96.25,67.2 96.95,67.2 97.65,67.2 98.35,67.2 99.05,67.2 99.75,67.2 100.45,67.2 101.15,67.2 101.85,67.2 102.55,67.2 103.25,67.2 103.95,67.2 104.65,67.2 105.35,67.2 106.05,67.2 108.15,67.2 108.85,67.2 109.55,67.2 110.25,67.2 110.95,67.2 111.65,67.2 112.35,67.2 113.05,67.2 113.75,67.2 114.45,67.2 115.15,67.2 115.85,67.2 116.55,67.2 117.25,67.2 117.95,67.2 118.65,67.2 119.35,67.2 120.05,67.2 120.75,67.2 121.45,67.2 122.15,67.2 122.85,67.2 123.55,67.2 124.25,67.2 124.95,67.2 125.65,67.2 126.35,67.2 127.05,67.2 127.75,67.2 128.45,67.2 129.15,67.2 129.85,67.2 130.55,67.2 131.25,67.2 131.95,67.2 132.65,67.2 133.35,67.2 134.05,67.2 134.75,67.2 135.45,67.2 136.15,67.2 136.85,67.2 137.55,67.2 138.25,67.2 138.95,67.2 139.65,67.2 140.35,67.2 141.05,67.2 141.75,67.2 142.45,67.2 143.15,67.2 143.85,67.2 144.55,67.2 145.25,67.2 145.95,67.2 146.65,67.2 147.35,67.2 148.05,67.2 149.45,67.2 150.15,67.2 150.85,67.2 81.9,67.9 82.6,67.9 83.3,67.9 84,67.9 85.4,67.9 86.1,67.9 86.8,67.9 87.5,67.9 88.2,67.9 88.9,67.9 89.6,67.9 91.7,67.9 92.4,67.9 93.1,67.9 93.8,67.9 94.5,67.9 95.2,67.9 95.9,67.9 96.6,67.9 97.3,67.9 98,67.9 98.7,67.9 99.4,67.9 100.1,67.9 100.8,67.9 101.5,67.9 102.2,67.9 102.9,67.9 103.6,67.9 104.3,67.9 105,67.9 105.7,67.9 106.4,67.9 107.8,67.9 108.5,67.9 109.2,67.9 109.9,67.9 110.6,67.9 111.3,67.9 112,67.9 112.7,67.9 113.4,67.9 114.1,67.9 114.8,67.9 115.5,67.9 116.2,67.9 116.9,67.9 117.6,67.9 118.3,67.9 119,67.9 119.7,67.9 120.4,67.9 121.1,67.9 121.8,67.9 122.5,67.9 123.2,67.9 123.9,67.9 124.6,67.9 125.3,67.9 126,67.9 126.7,67.9 127.4,67.9 128.1,67.9 128.8,67.9 129.5,67.9 130.2,67.9 130.9,67.9 131.6,67.9 132.3,67.9 133,67.9 133.7,67.9 134.4,67.9 135.1,67.9 135.8,67.9 136.5,67.9 137.2,67.9 137.9,67.9 138.6,67.9 139.3,67.9 140,67.9 140.7,67.9 141.4,67.9 142.1,67.9 142.8,67.9 143.5,67.9 144.2,67.9 144.9,67.9 145.6,67.9 146.3,67.9 147,67.9 147.7,67.9 149.8,67.9 150.5,67.9 81.55,68.6 82.25,68.6 82.95,68.6 83.65,68.6 85.75,68.6 86.45,68.6 87.15,68.6 87.85,68.6 88.55,68.6 89.25,68.6 89.95,68.6 91.35,68.6 92.05,68.6 92.75,68.6 93.45,68.6 94.15,68.6 94.85,68.6 95.55,68.6 96.25,68.6 96.95,68.6 97.65,68.6 98.35,68.6 99.05,68.6 99.75,68.6 100.45,68.6 101.15,68.6 101.85,68.6 102.55,68.6 103.25,68.6 103.95,68.6 104.65,68.6 105.35,68.6 106.05,68.6 108.15,68.6 108.85,68.6 109.55,68.6 110.25,68.6 110.95,68.6 111.65,68.6 112.35,68.6 113.05,68.6 113.75,68.6 114.45,68.6 115.15,68.6 115.85,68.6 116.55,68.6 117.25,68.6 117.95,68.6 118.65,68.6 119.35,68.6 120.05,68.6 120.75,68.6 121.45,68.6 122.15,68.6 122.85,68.6 123.55,68.6 124.25,68.6 124.95,68.6 125.65,68.6 126.35,68.6 127.05,68.6 127.75,68.6 128.45,68.6 129.15,68.6 129.85,68.6 130.55,68.6 131.25,68.6 131.95,68.6 132.65,68.6 133.35,68.6 134.05,68.6 134.75,68.6 135.45,68.6 136.15,68.6 136.85,68.6 137.55,68.6 138.25,68.6 138.95,68.6 139.65,68.6 140.35,68.6 141.05,68.6 141.75,68.6 142.45,68.6 143.15,68.6 143.85,68.6 144.55,68.6 145.25,68.6 145.95,68.6 146.65,68.6 147.35,68.6 148.05,68.6 149.45,68.6 150.15,68.6 150.85,68.6 81.9,69.3 82.6,69.3 83.3,69.3 84,69.3 85.4,69.3 86.1,69.3 86.8,69.3 87.5,69.3 88.2,69.3 88.9,69.3 89.6,69.3 91.7,69.3 92.4,69.3 93.1,69.3 93.8,69.3 94.5,69.3 95.2,69.3 95.9,69.3 96.6,69.3 97.3,69.3 98,69.3 98.7,69.3 99.4,69.3 100.1,69.3 100.8,69.3 101.5,69.3 102.2,69.3 102.9,69.3 103.6,69.3 104.3,69.3 105,69.3 105.7,69.3 106.4,69.3 107.8,69.3 108.5,69.3 109.2,69.3 109.9,69.3 110.6,69.3 111.3,69.3 112,69.3 112.7,69.3 113.4,69.3 114.1,69.3 114.8,69.3 115.5,69.3 116.2,69.3 116.9,69.3 117.6,69.3 118.3,69.3 119,69.3 119.7,69.3 120.4,69.3 121.1,69.3 121.8,69.3 122.5,69.3 123.2,69.3 123.9,69.3 124.6,69.3 125.3,69.3 126,69.3 126.7,69.3 127.4,69.3 128.1,69.3 128.8,69.3 129.5,69.3 130.2,69.3 130.9,69.3 131.6,69.3 132.3,69.3 133,69.3 133.7,69.3 134.4,69.3 135.1,69.3 135.8,69.3 136.5,69.3 137.2,69.3 137.9,69.3 138.6,69.3 139.3,69.3 140,69.3 140.7,69.3 141.4,69.3 142.1,69.3 142.8,69.3 143.5,69.3 144.2,69.3 144.9,69.3 145.6,69.3 146.3,69.3 147,69.3 147.7,69.3 149.8,69.3 150.5,69.3 81.55,70 82.25,70 82.95,70 83.65,70 85.75,70 86.45,70 87.15,70 87.85,70 88.55,70 89.25,70 89.95,70 91.35,70 92.05,70 92.75,70 93.45,70 94.15,70 94.85,70 95.55,70 96.25,70 96.95,70 97.65,70 98.35,70 99.05,70 99.75,70 100.45,70 101.15,70 101.85,70 102.55,70 103.25,70 103.95,70 104.65,70 105.35,70 106.05,70 108.15,70 108.85,70 109.55,70 110.25,70 110.95,70 111.65,70 112.35,70 113.05,70 113.75,70 114.45,70 115.15,70 115.85,70 116.55,70 117.25,70 117.95,70 118.65,70 119.35,70 120.05,70 120.75,70 121.45,70 122.15,70 122.85,70 123.55,70 124.25,70 124.95,70 125.65,70 126.35,70 127.05,70 127.75,70 128.45,70 129.15,70 129.85,70 130.55,70 131.25,70 131.95,70 132.65,70 133.35,70 134.05,70 134.75,70 135.45,70 136.15,70 136.85,70 137.55,70 138.25,70 138.95,70 139.65,70 140.35,70 141.05,70 141.75,70 142.45,70 143.15,70 143.85,70 144.55,70 145.25,70 145.95,70 146.65,70 147.35,70 148.05,70 149.45,70 150.15,70 150.85,70 81.9,70.7 82.6,70.7 83.3,70.7 84,70.7 85.4,70.7 86.1,70.7 86.8,70.7 87.5,70.7 88.2,70.7 88.9,70.7 89.6,70.7 91.7,70.7 92.4,70.7 93.1,70.7 93.8,70.7 94.5,70.7 95.2,70.7 95.9,70.7 96.6,70.7 97.3,70.7 98,70.7 98.7,70.7 99.4,70.7 100.1,70.7 100.8,70.7 101.5,70.7 102.2,70.7 102.9,70.7 103.6,70.7 104.3,70.7 105,70.7 105.7,70.7 106.4,70.7 107.8,70.7 108.5,70.7 109.2,70.7 109.9,70.7 110.6,70.7 111.3,70.7 112,70.7 112.7,70.7 113.4,70.7 114.1,70.7 114.8,70.7 115.5,70.7 116.2,70.7 116.9,70.7 117.6,70.7 118.3,70.7 119,70.7 119.7,70.7 120.4,70.7 121.1,70.7 121.8,70.7 122.5,70.7 123.2,70.7 123.9,70.7 124.6,70.7 125.3,70.7 126,70.7 126.7,70.7 127.4,70.7 128.1,70.7 128.8,70.7 129.5,70.7 130.2,70.7 130.9,70.7 131.6,70.7 132.3,70.7 133,70.7 133.7,70.7 134.4,70.7 135.1,70.7 135.8,70.7 136.5,70.7 137.2,70.7 137.9,70.7 138.6,70.7 139.3,70.7 140,70.7 140.7,70.7 141.4,70.7 142.1,70.7 142.8,70.7 143.5,70.7 144.2,70.7 144.9,70.7 145.6,70.7 146.3,70.7 147,70.7 147.7,70.7 149.8,70.7 150.5,70.7 81.55,71.4 82.25,71.4 82.95,71.4 83.65,71.4 85.75,71.4 86.45,71.4 87.15,71.4 87.85,71.4 88.55,71.4 90.65,71.4 91.35,71.4 92.05,71.4 92.75,71.4 93.45,71.4 94.15,71.4 94.85,71.4 95.55,71.4 96.25,71.4 96.95,71.4 97.65,71.4 98.35,71.4 99.05,71.4 99.75,71.4 100.45,71.4 101.15,71.4 101.85,71.4 102.55,71.4 103.25,71.4 103.95,71.4 104.65,71.4 105.35,71.4 106.05,71.4 108.15,71.4 108.85,71.4 109.55,71.4 110.25,71.4 110.95,71.4 111.65,71.4 112.35,71.4 113.05,71.4 113.75,71.4 114.45,71.4 115.15,71.4 115.85,71.4 116.55,71.4 117.25,71.4 117.95,71.4 118.65,71.4 119.35,71.4 120.05,71.4 120.75,71.4 121.45,71.4 122.15,71.4 122.85,71.4 123.55,71.4 124.25,71.4 124.95,71.4 125.65,71.4 126.35,71.4 127.05,71.4 127.75,71.4 128.45,71.4 129.15,71.4 129.85,71.4 130.55,71.4 131.95,71.4 132.65,71.4 133.35,71.4 134.05,71.4 134.75,71.4 135.45,71.4 136.15,71.4 136.85,71.4 137.55,71.4 138.25,71.4 138.95,71.4 139.65,71.4 140.35,71.4 141.05,71.4 141.75,71.4 142.45,71.4 143.15,71.4 143.85,71.4 144.55,71.4 145.25,71.4 145.95,71.4 146.65,71.4 147.35,71.4 148.05,71.4 149.45,71.4 150.15,71.4 150.85,71.4 81.9,72.1 82.6,72.1 83.3,72.1 84,72.1 85.4,72.1 86.1,72.1 86.8,72.1 87.5,72.1 88.2,72.1 90.3,72.1 91,72.1 91.7,72.1 92.4,72.1 93.1,72.1 93.8,72.1 94.5,72.1 95.2,72.1 95.9,72.1 96.6,72.1 97.3,72.1 98,72.1 98.7,72.1 99.4,72.1 100.1,72.1 100.8,72.1 101.5,72.1 102.2,72.1 102.9,72.1 103.6,72.1 104.3,72.1 105,72.1 105.7,72.1 106.4,72.1 107.8,72.1 108.5,72.1 109.2,72.1 109.9,72.1 110.6,72.1 111.3,72.1 112,72.1 112.7,72.1 113.4,72.1 114.1,72.1 114.8,72.1 115.5,72.1 116.2,72.1 116.9,72.1 117.6,72.1 118.3,72.1 119,72.1 119.7,72.1 120.4,72.1 121.1,72.1 121.8,72.1 122.5,72.1 123.2,72.1 123.9,72.1 124.6,72.1 125.3,72.1 126,72.1 126.7,72.1 127.4,72.1 128.1,72.1 128.8,72.1 129.5,72.1 133,72.1 133.7,72.1 134.4,72.1 135.1,72.1 135.8,72.1 136.5,72.1 137.2,72.1 137.9,72.1 138.6,72.1 139.3,72.1 140,72.1 140.7,72.1 141.4,72.1 142.1,72.1 142.8,72.1 143.5,72.1 144.2,72.1 144.9,72.1 145.6,72.1 146.3,72.1 147,72.1 147.7,72.1 149.8,72.1 150.5,72.1 81.55,72.8 82.25,72.8 82.95,72.8 83.65,72.8 85.75,72.8 86.45,72.8 87.15,72.8 89.25,72.8 89.95,72.8 90.65,72.8 91.35,72.8 92.05,72.8 92.75,72.8 93.45,72.8 94.15,72.8 94.85,72.8 95.55,72.8 96.25,72.8 96.95,72.8 97.65,72.8 98.35,72.8 99.05,72.8 99.75,72.8 100.45,72.8 101.15,72.8 101.85,72.8 102.55,72.8 103.25,72.8 103.95,72.8 104.65,72.8 105.35,72.8 106.05,72.8 108.15,72.8 108.85,72.8 109.55,72.8 110.25,72.8 110.95,72.8 111.65,72.8 112.35,72.8 113.05,72.8 113.75,72.8 114.45,72.8 132.65,72.8 133.35,72.8 134.05,72.8 134.75,72.8 135.45,72.8 136.15,72.8 136.85,72.8 137.55,72.8 138.25,72.8 138.95,72.8 139.65,72.8 140.35,72.8 141.05,72.8 141.75,72.8 142.45,72.8 143.15,72.8 143.85,72.8 144.55,72.8 145.25,72.8 145.95,72.8 146.65,72.8 147.35,72.8 148.05,72.8 149.45,72.8 150.15,72.8 150.85,72.8 81.9,73.5 82.6,73.5 83.3,73.5 84,73.5 85.4,73.5 86.1,73.5 86.8,73.5 88.9,73.5 89.6,73.5 90.3,73.5 91,73.5 91.7,73.5 92.4,73.5 93.1,73.5 93.8,73.5 94.5,73.5 95.2,73.5 95.9,73.5 96.6,73.5 97.3,73.5 98,73.5 98.7,73.5 99.4,73.5 100.1,73.5 100.8,73.5 101.5,73.5 102.2,73.5 102.9,73.5 103.6,73.5 104.3,73.5 105,73.5 105.7,73.5 106.4,73.5 107.8,73.5 108.5,73.5 109.2,73.5 109.9,73.5 110.6,73.5 111.3,73.5 112,73.5 112.7,73.5 113.4,73.5 114.1,73.5 133,73.5 133.7,73.5 134.4,73.5 135.1,73.5 135.8,73.5 136.5,73.5 137.2,73.5 137.9,73.5 138.6,73.5 139.3,73.5 140,73.5 140.7,73.5 141.4,73.5 142.1,73.5 142.8,73.5 143.5,73.5 144.2,73.5 144.9,73.5 145.6,73.5 146.3,73.5 147,73.5 147.7,73.5 149.8,73.5 150.5,73.5 81.55,74.2 82.25,74.2 82.95,74.2 83.65,74.2 85.75,74.2 87.85,74.2 88.55,74.2 89.25,74.2 89.95,74.2 90.65,74.2 91.35,74.2 92.05,74.2 92.75,74.2 93.45,74.2 94.15,74.2 94.85,74.2 95.55,74.2 96.25,74.2 96.95,74.2 97.65,74.2 98.35,74.2 99.05,74.2 99.75,74.2 100.45,74.2 101.15,74.2 101.85,74.2 102.55,74.2 103.25,74.2 103.95,74.2 104.65,74.2 105.35,74.2 106.05,74.2 108.15,74.2 108.85,74.2 109.55,74.2 110.25,74.2 110.95,74.2 111.65,74.2 112.35,74.2 113.05,74.2 113.75,74.2 114.45,74.2 132.65,74.2 133.35,74.2 134.05,74.2 134.75,74.2 135.45,74.2 136.15,74.2 136.85,74.2 137.55,74.2 138.25,74.2 138.95,74.2 139.65,74.2 140.35,74.2 141.05,74.2 141.75,74.2 142.45,74.2 143.15,74.2 143.85,74.2 144.55,74.2 145.25,74.2 145.95,74.2 146.65,74.2 147.35,74.2 148.05,74.2 149.45,74.2 150.15,74.2 150.85,74.2 81.9,74.9 82.6,74.9 83.3,74.9 84,74.9 85.4,74.9 87.5,74.9 88.2,74.9 88.9,74.9 89.6,74.9 90.3,74.9 91,74.9 91.7,74.9 92.4,74.9 93.1,74.9 93.8,74.9 94.5,74.9 95.2,74.9 95.9,74.9 96.6,74.9 97.3,74.9 98,74.9 98.7,74.9 99.4,74.9 100.1,74.9 100.8,74.9 101.5,74.9 102.2,74.9 102.9,74.9 103.6,74.9 104.3,74.9 105,74.9 105.7,74.9 106.4,74.9 107.8,74.9 108.5,74.9 109.2,74.9 109.9,74.9 110.6,74.9 111.3,74.9 112,74.9 112.7,74.9 113.4,74.9 114.1,74.9 133,74.9 133.7,74.9 134.4,74.9 135.1,74.9 135.8,74.9 136.5,74.9 137.2,74.9 137.9,74.9 138.6,74.9 139.3,74.9 140,74.9 140.7,74.9 141.4,74.9 142.1,74.9 142.8,74.9 143.5,74.9 144.2,74.9 144.9,74.9 145.6,74.9 146.3,74.9 147,74.9 147.7,74.9 149.8,74.9 150.5,74.9 81.55,75.6 82.25,75.6 82.95,75.6 83.65,75.6 86.45,75.6 87.15,75.6 87.85,75.6 88.55,75.6 89.25,75.6 89.95,75.6 90.65,75.6 91.35,75.6 92.05,75.6 92.75,75.6 93.45,75.6 94.15,75.6 94.85,75.6 95.55,75.6 96.25,75.6 96.95,75.6 97.65,75.6 98.35,75.6 99.05,75.6 99.75,75.6 100.45,75.6 101.15,75.6 101.85,75.6 102.55,75.6 103.25,75.6 103.95,75.6 104.65,75.6 105.35,75.6 106.05,75.6 108.15,75.6 108.85,75.6 109.55,75.6 110.25,75.6 110.95,75.6 111.65,75.6 112.35,75.6 113.05,75.6 113.75,75.6 114.45,75.6 132.65,75.6 133.35,75.6 134.05,75.6 134.75,75.6 135.45,75.6 136.15,75.6 137.55,75.6 138.25,75.6 138.95,75.6 139.65,75.6 140.35,75.6 141.05,75.6 141.75,75.6 142.45,75.6 143.15,75.6 143.85,75.6 144.55,75.6 145.25,75.6 145.95,75.6 146.65,75.6 147.35,75.6 148.05,75.6 149.45,75.6 150.15,75.6 150.85,75.6 81.9,76.3 82.6,76.3 83.3,76.3 86.1,76.3 86.8,76.3 87.5,76.3 88.2,76.3 88.9,76.3 89.6,76.3 90.3,76.3 91,76.3 91.7,76.3 92.4,76.3 93.1,76.3 93.8,76.3 94.5,76.3 95.2,76.3 95.9,76.3 96.6,76.3 97.3,76.3 98,76.3 98.7,76.3 99.4,76.3 100.1,76.3 100.8,76.3 101.5,76.3 102.2,76.3 102.9,76.3 103.6,76.3 104.3,76.3 105,76.3 105.7,76.3 106.4,76.3 107.8,76.3 108.5,76.3 109.2,76.3 109.9,76.3 110.6,76.3 111.3,76.3 112,76.3 112.7,76.3 113.4,76.3 114.1,76.3 133,76.3 133.7,76.3 134.4,76.3 135.1,76.3 137.9,76.3 138.6,76.3 139.3,76.3 140,76.3 140.7,76.3 141.4,76.3 142.1,76.3 142.8,76.3 143.5,76.3 144.2,76.3 144.9,76.3 145.6,76.3 146.3,76.3 147,76.3 147.7,76.3 149.8,76.3 150.5,76.3 81.55,77 82.25,77 82.95,77 85.05,77 85.75,77 86.45,77 87.15,77 87.85,77 88.55,77 89.25,77 89.95,77 90.65,77 91.35,77 92.05,77 92.75,77 93.45,77 94.15,77 94.85,77 95.55,77 96.25,77 96.95,77 97.65,77 98.35,77 99.05,77 99.75,77 100.45,77 101.15,77 101.85,77 102.55,77 103.25,77 103.95,77 104.65,77 105.35,77 106.05,77 108.15,77 108.85,77 109.55,77 110.25,77 110.95,77 111.65,77 112.35,77 113.05,77 113.75,77 114.45,77 138.25,77 138.95,77 139.65,77 140.35,77 141.05,77 141.75,77 142.45,77 143.15,77 143.85,77 144.55,77 145.25,77 145.95,77 146.65,77 147.35,77 148.05,77 149.45,77 150.15,77 150.85,77 81.9,77.7 84.7,77.7 85.4,77.7 86.1,77.7 86.8,77.7 87.5,77.7 88.2,77.7 88.9,77.7 89.6,77.7 90.3,77.7 91,77.7 91.7,77.7 92.4,77.7 93.1,77.7 93.8,77.7 94.5,77.7 95.2,77.7 95.9,77.7 96.6,77.7 97.3,77.7 98,77.7 98.7,77.7 99.4,77.7 100.1,77.7 100.8,77.7 101.5,77.7 102.2,77.7 102.9,77.7 103.6,77.7 104.3,77.7 105,77.7 105.7,77.7 106.4,77.7 107.8,77.7 108.5,77.7 109.2,77.7 109.9,77.7 110.6,77.7 111.3,77.7 112,77.7 112.7,77.7 113.4,77.7 114.1,77.7 137.9,77.7 138.6,77.7 139.3,77.7 140,77.7 140.7,77.7 141.4,77.7 142.1,77.7 142.8,77.7 143.5,77.7 144.2,77.7 144.9,77.7 145.6,77.7 146.3,77.7 147,77.7 147.7,77.7 149.8,77.7 150.5,77.7 80.85,78.4 81.55,78.4 83.65,78.4 84.35,78.4 85.05,78.4 85.75,78.4 86.45,78.4 87.15,78.4 87.85,78.4 88.55,78.4 89.25,78.4 89.95,78.4 90.65,78.4 91.35,78.4 92.05,78.4 92.75,78.4 93.45,78.4 94.15,78.4 94.85,78.4 95.55,78.4 96.25,78.4 96.95,78.4 97.65,78.4 98.35,78.4 99.05,78.4 99.75,78.4 100.45,78.4 101.15,78.4 101.85,78.4 102.55,78.4 103.25,78.4 103.95,78.4 104.65,78.4 105.35,78.4 106.05,78.4 108.15,78.4 108.85,78.4 109.55,78.4 110.25,78.4 110.95,78.4 111.65,78.4 112.35,78.4 113.05,78.4 113.75,78.4 114.45,78.4 138.25,78.4 138.95,78.4 139.65,78.4 140.35,78.4 141.05,78.4 141.75,78.4 142.45,78.4 143.15,78.4 143.85,78.4 144.55,78.4 145.25,78.4 145.95,78.4 146.65,78.4 147.35,78.4 148.05,78.4 149.45,78.4 150.15,78.4 150.85,78.4 80.5,79.1 83.3,79.1 84,79.1 84.7,79.1 85.4,79.1 86.1,79.1 86.8,79.1 87.5,79.1 88.2,79.1 88.9,79.1 89.6,79.1 90.3,79.1 91,79.1 91.7,79.1 92.4,79.1 93.1,79.1 93.8,79.1 94.5,79.1 95.2,79.1 95.9,79.1 96.6,79.1 97.3,79.1 98,79.1 98.7,79.1 99.4,79.1 100.1,79.1 100.8,79.1 101.5,79.1 102.2,79.1 102.9,79.1 103.6,79.1 104.3,79.1 105,79.1 105.7,79.1 106.4,79.1 107.8,79.1 108.5,79.1 109.2,79.1 109.9,79.1 110.6,79.1 111.3,79.1 112,79.1 112.7,79.1 113.4,79.1 114.1,79.1 137.9,79.1 138.6,79.1 139.3,79.1 140,79.1 140.7,79.1 141.4,79.1 142.1,79.1 142.8,79.1 143.5,79.1 144.2,79.1 144.9,79.1 145.6,79.1 146.3,79.1 147,79.1 147.7,79.1 149.8,79.1 150.5,79.1 79.45,79.8 80.15,79.8 82.25,79.8 82.95,79.8 83.65,79.8 84.35,79.8 85.05,79.8 85.75,79.8 86.45,79.8 87.15,79.8 87.85,79.8 88.55,79.8 89.25,79.8 89.95,79.8 90.65,79.8 91.35,79.8 92.05,79.8 92.75,79.8 93.45,79.8 94.15,79.8 94.85,79.8 95.55,79.8 96.25,79.8 96.95,79.8 97.65,79.8 98.35,79.8 99.05,79.8 99.75,79.8 100.45,79.8 101.15,79.8 101.85,79.8 102.55,79.8 103.25,79.8 103.95,79.8 104.65,79.8 105.35,79.8 106.05,79.8 108.15,79.8 108.85,79.8 109.55,79.8 110.25,79.8 110.95,79.8 111.65,79.8 112.35,79.8 113.05,79.8 113.75,79.8 114.45,79.8 138.25,79.8 138.95,79.8 139.65,79.8 140.35,79.8 141.05,79.8 141.75,79.8 142.45,79.8 143.15,79.8 143.85,79.8 144.55,79.8 145.25,79.8 145.95,79.8 146.65,79.8 147.35,79.8 148.05,79.8 149.45,79.8 150.15,79.8 150.85,79.8 79.1,80.5 81.9,80.5 82.6,80.5 83.3,80.5 84,80.5 84.7,80.5 85.4,80.5 86.1,80.5 86.8,80.5 87.5,80.5 88.2,80.5 88.9,80.5 89.6,80.5 90.3,80.5 91,80.5 91.7,80.5 92.4,80.5 93.1,80.5 93.8,80.5 94.5,80.5 95.2,80.5 95.9,80.5 96.6,80.5 97.3,80.5 98,80.5 98.7,80.5 99.4,80.5 100.1,80.5 100.8,80.5 101.5,80.5 102.2,80.5 102.9,80.5 103.6,80.5 104.3,80.5 105,80.5 105.7,80.5 106.4,80.5 107.8,80.5 108.5,80.5 109.2,80.5 109.9,80.5 110.6,80.5 111.3,80.5 112,80.5 112.7,80.5 113.4,80.5 114.1,80.5 137.9,80.5 138.6,80.5 139.3,80.5 140,80.5 140.7,80.5 141.4,80.5 142.1,80.5 142.8,80.5 143.5,80.5 144.2,80.5 144.9,80.5 145.6,80.5 146.3,80.5 147,80.5 147.7,80.5 149.8,80.5 150.5,80.5 78.05,81.2 78.75,81.2 80.85,81.2 81.55,81.2 82.25,81.2 82.95,81.2 83.65,81.2 84.35,81.2 85.05,81.2 85.75,81.2 86.45,81.2 87.15,81.2 87.85,81.2 88.55,81.2 89.25,81.2 89.95,81.2 90.65,81.2 91.35,81.2 92.05,81.2 92.75,81.2 93.45,81.2 94.15,81.2 94.85,81.2 95.55,81.2 96.25,81.2 96.95,81.2 97.65,81.2 98.35,81.2 99.05,81.2 99.75,81.2 100.45,81.2 101.15,81.2 101.85,81.2 102.55,81.2 103.25,81.2 103.95,81.2 104.65,81.2 105.35,81.2 106.05,81.2 108.15,81.2 108.85,81.2 109.55,81.2 110.25,81.2 110.95,81.2 111.65,81.2 112.35,81.2 113.05,81.2 113.75,81.2 114.45,81.2 138.25,81.2 138.95,81.2 139.65,81.2 140.35,81.2 141.05,81.2 141.75,81.2 142.45,81.2 143.15,81.2 143.85,81.2 144.55,81.2 145.25,81.2 145.95,81.2 146.65,81.2 147.35,81.2 148.05,81.2 149.45,81.2 150.15,81.2 150.85,81.2 77.7,81.9 80.5,81.9 81.2,81.9 81.9,81.9 82.6,81.9 83.3,81.9 84,81.9 84.7,81.9 85.4,81.9 86.1,81.9 86.8,81.9 87.5,81.9 88.2,81.9 88.9,81.9 89.6,81.9 90.3,81.9 91,81.9 91.7,81.9 92.4,81.9 93.1,81.9 93.8,81.9 94.5,81.9 95.2,81.9 95.9,81.9 96.6,81.9 97.3,81.9 98,81.9 98.7,81.9 99.4,81.9 100.1,81.9 100.8,81.9 101.5,81.9 102.2,81.9 102.9,81.9 103.6,81.9 104.3,81.9 105,81.9 105.7,81.9 106.4,81.9 107.8,81.9 108.5,81.9 109.2,81.9 109.9,81.9 110.6,81.9 111.3,81.9 112,81.9 112.7,81.9 113.4,81.9 137.9,81.9 138.6,81.9 139.3,81.9 141.4,81.9 142.1,81.9 142.8,81.9 143.5,81.9 144.2,81.9 144.9,81.9 145.6,81.9 146.3,81.9 147,81.9 147.7,81.9 149.8,81.9 150.5,81.9 76.65,82.6 77.35,82.6 79.45,82.6 80.15,82.6 80.85,82.6 81.55,82.6 82.25,82.6 82.95,82.6 83.65,82.6 84.35,82.6 85.05,82.6 85.75,82.6 86.45,82.6 87.15,82.6 87.85,82.6 88.55,82.6 89.25,82.6 89.95,82.6 90.65,82.6 91.35,82.6 92.05,82.6 92.75,82.6 93.45,82.6 94.15,82.6 94.85,82.6 95.55,82.6 96.25,82.6 96.95,82.6 97.65,82.6 98.35,82.6 99.05,82.6 99.75,82.6 100.45,82.6 101.15,82.6 101.85,82.6 102.55,82.6 103.25,82.6 103.95,82.6 104.65,82.6 105.35,82.6 106.05,82.6 108.15,82.6 108.85,82.6 109.55,82.6 110.25,82.6 110.95,82.6 111.65,82.6 112.35,82.6 113.05,82.6 138.25,82.6 138.95,82.6 142.45,82.6 143.15,82.6 143.85,82.6 144.55,82.6 145.25,82.6 145.95,82.6 146.65,82.6 147.35,82.6 148.05,82.6 149.45,82.6 150.15,82.6 150.85,82.6 76.3,83.3 79.1,83.3 79.8,83.3 80.5,83.3 81.2,83.3 81.9,83.3 82.6,83.3 83.3,83.3 84,83.3 84.7,83.3 85.4,83.3 86.1,83.3 86.8,83.3 87.5,83.3 88.2,83.3 88.9,83.3 89.6,83.3 90.3,83.3 91,83.3 91.7,83.3 92.4,83.3 93.1,83.3 93.8,83.3 94.5,83.3 95.2,83.3 95.9,83.3 96.6,83.3 97.3,83.3 98,83.3 98.7,83.3 99.4,83.3 100.1,83.3 100.8,83.3 101.5,83.3 102.2,83.3 102.9,83.3 103.6,83.3 104.3,83.3 105,83.3 105.7,83.3 106.4,83.3 107.8,83.3 108.5,83.3 109.2,83.3 109.9,83.3 110.6,83.3 111.3,83.3 112,83.3 142.1,83.3 142.8,83.3 143.5,83.3 144.2,83.3 144.9,83.3 145.6,83.3 146.3,83.3 147,83.3 147.7,83.3 149.8,83.3 150.5,83.3 75.25,84